# EAGLE board PSv1_18_2_12 (EAGLE 5.10)
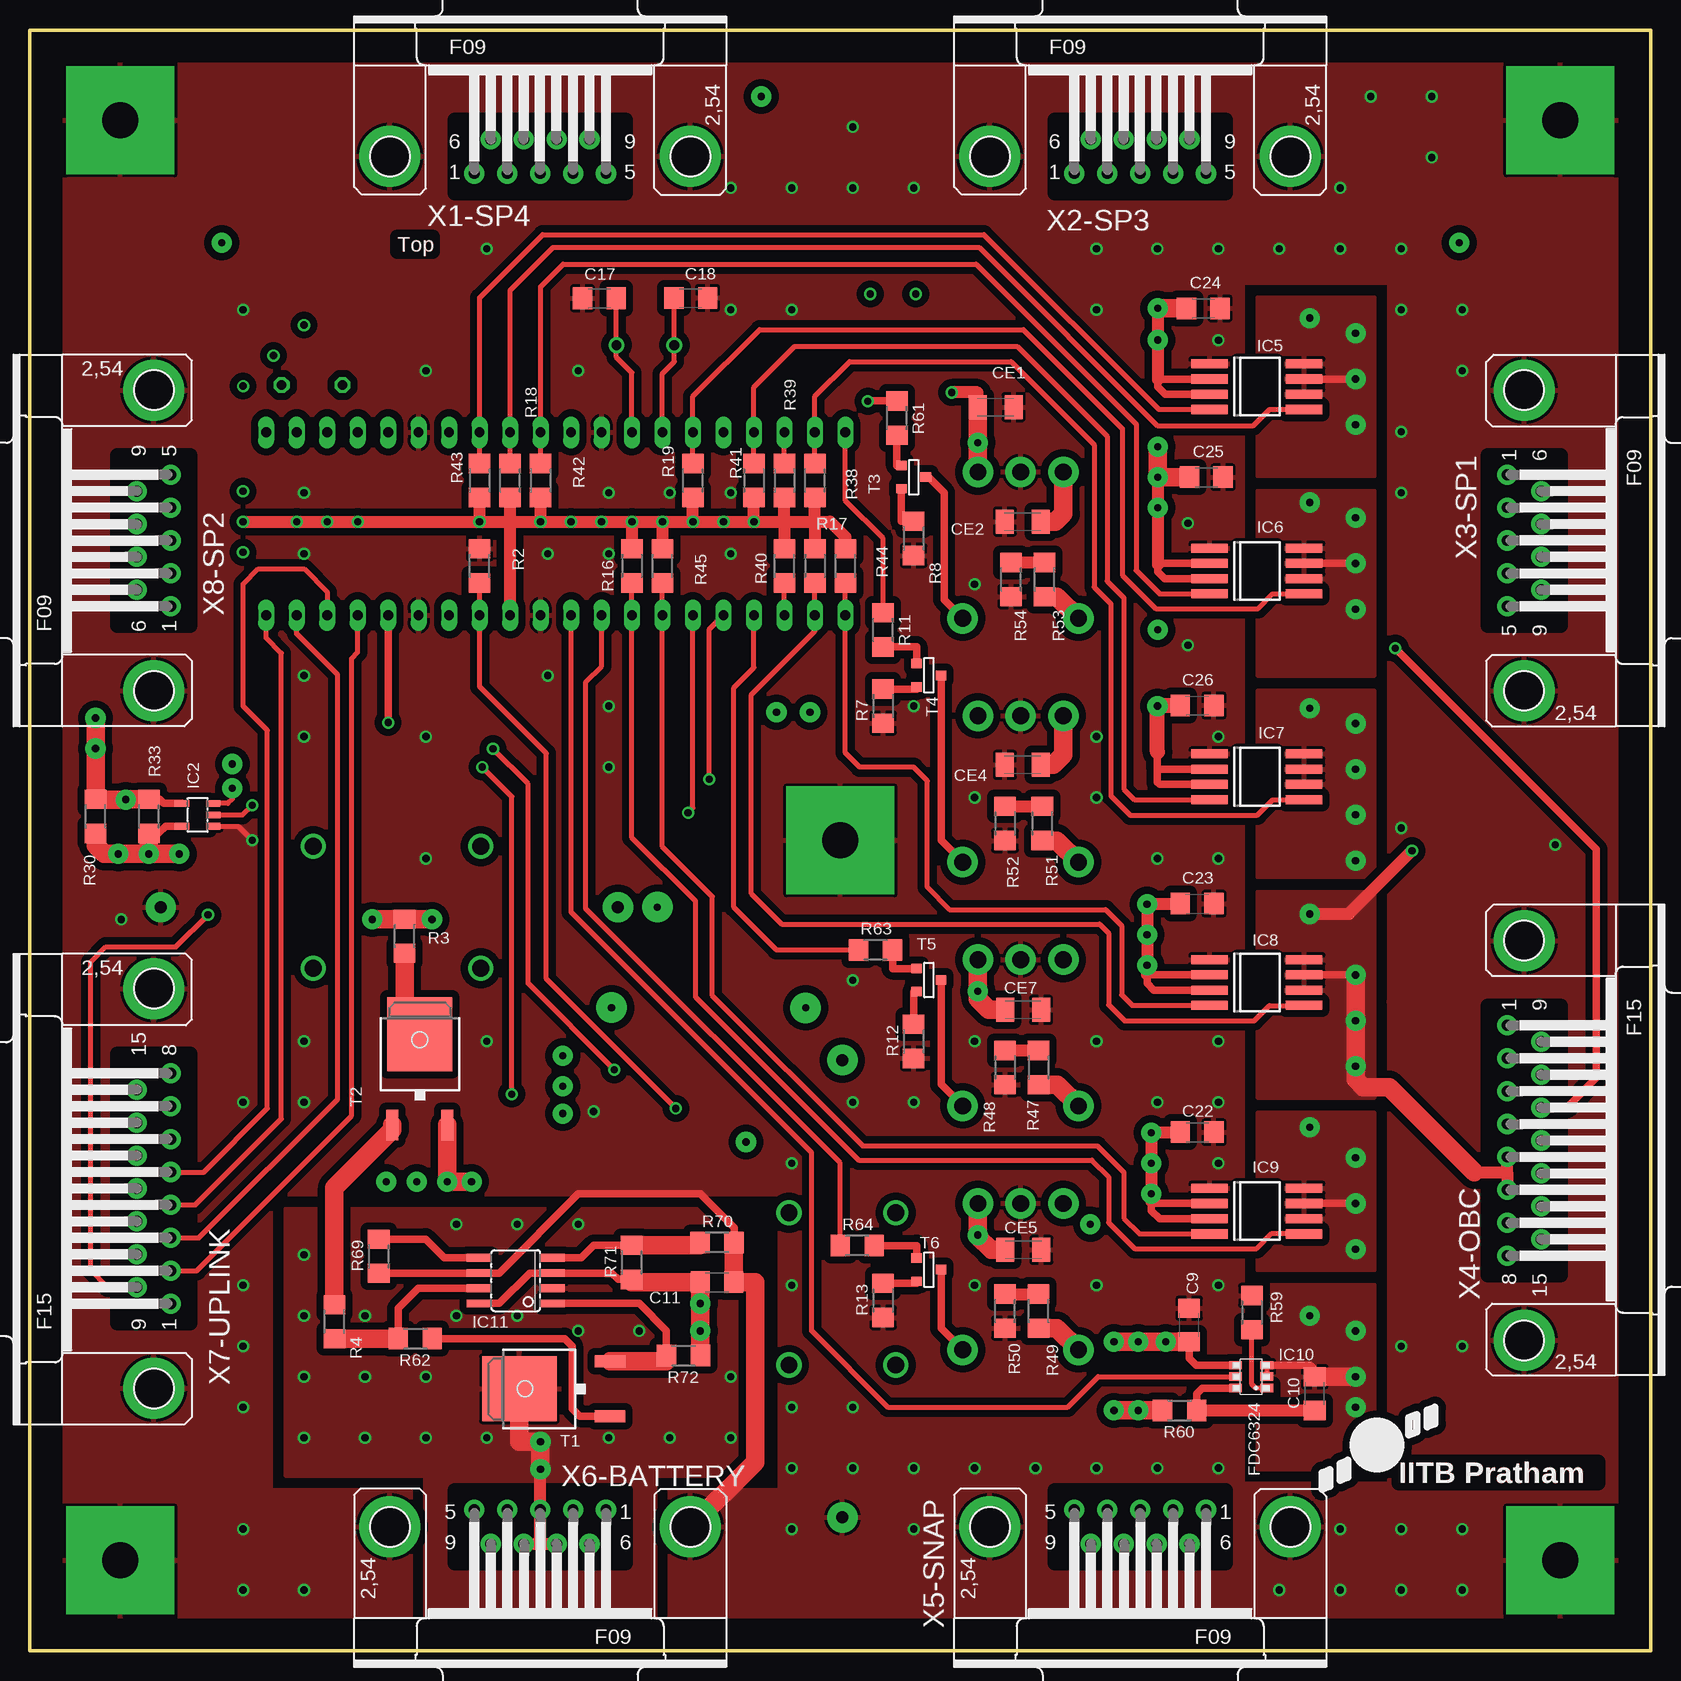
[diagram p0: board, top side]
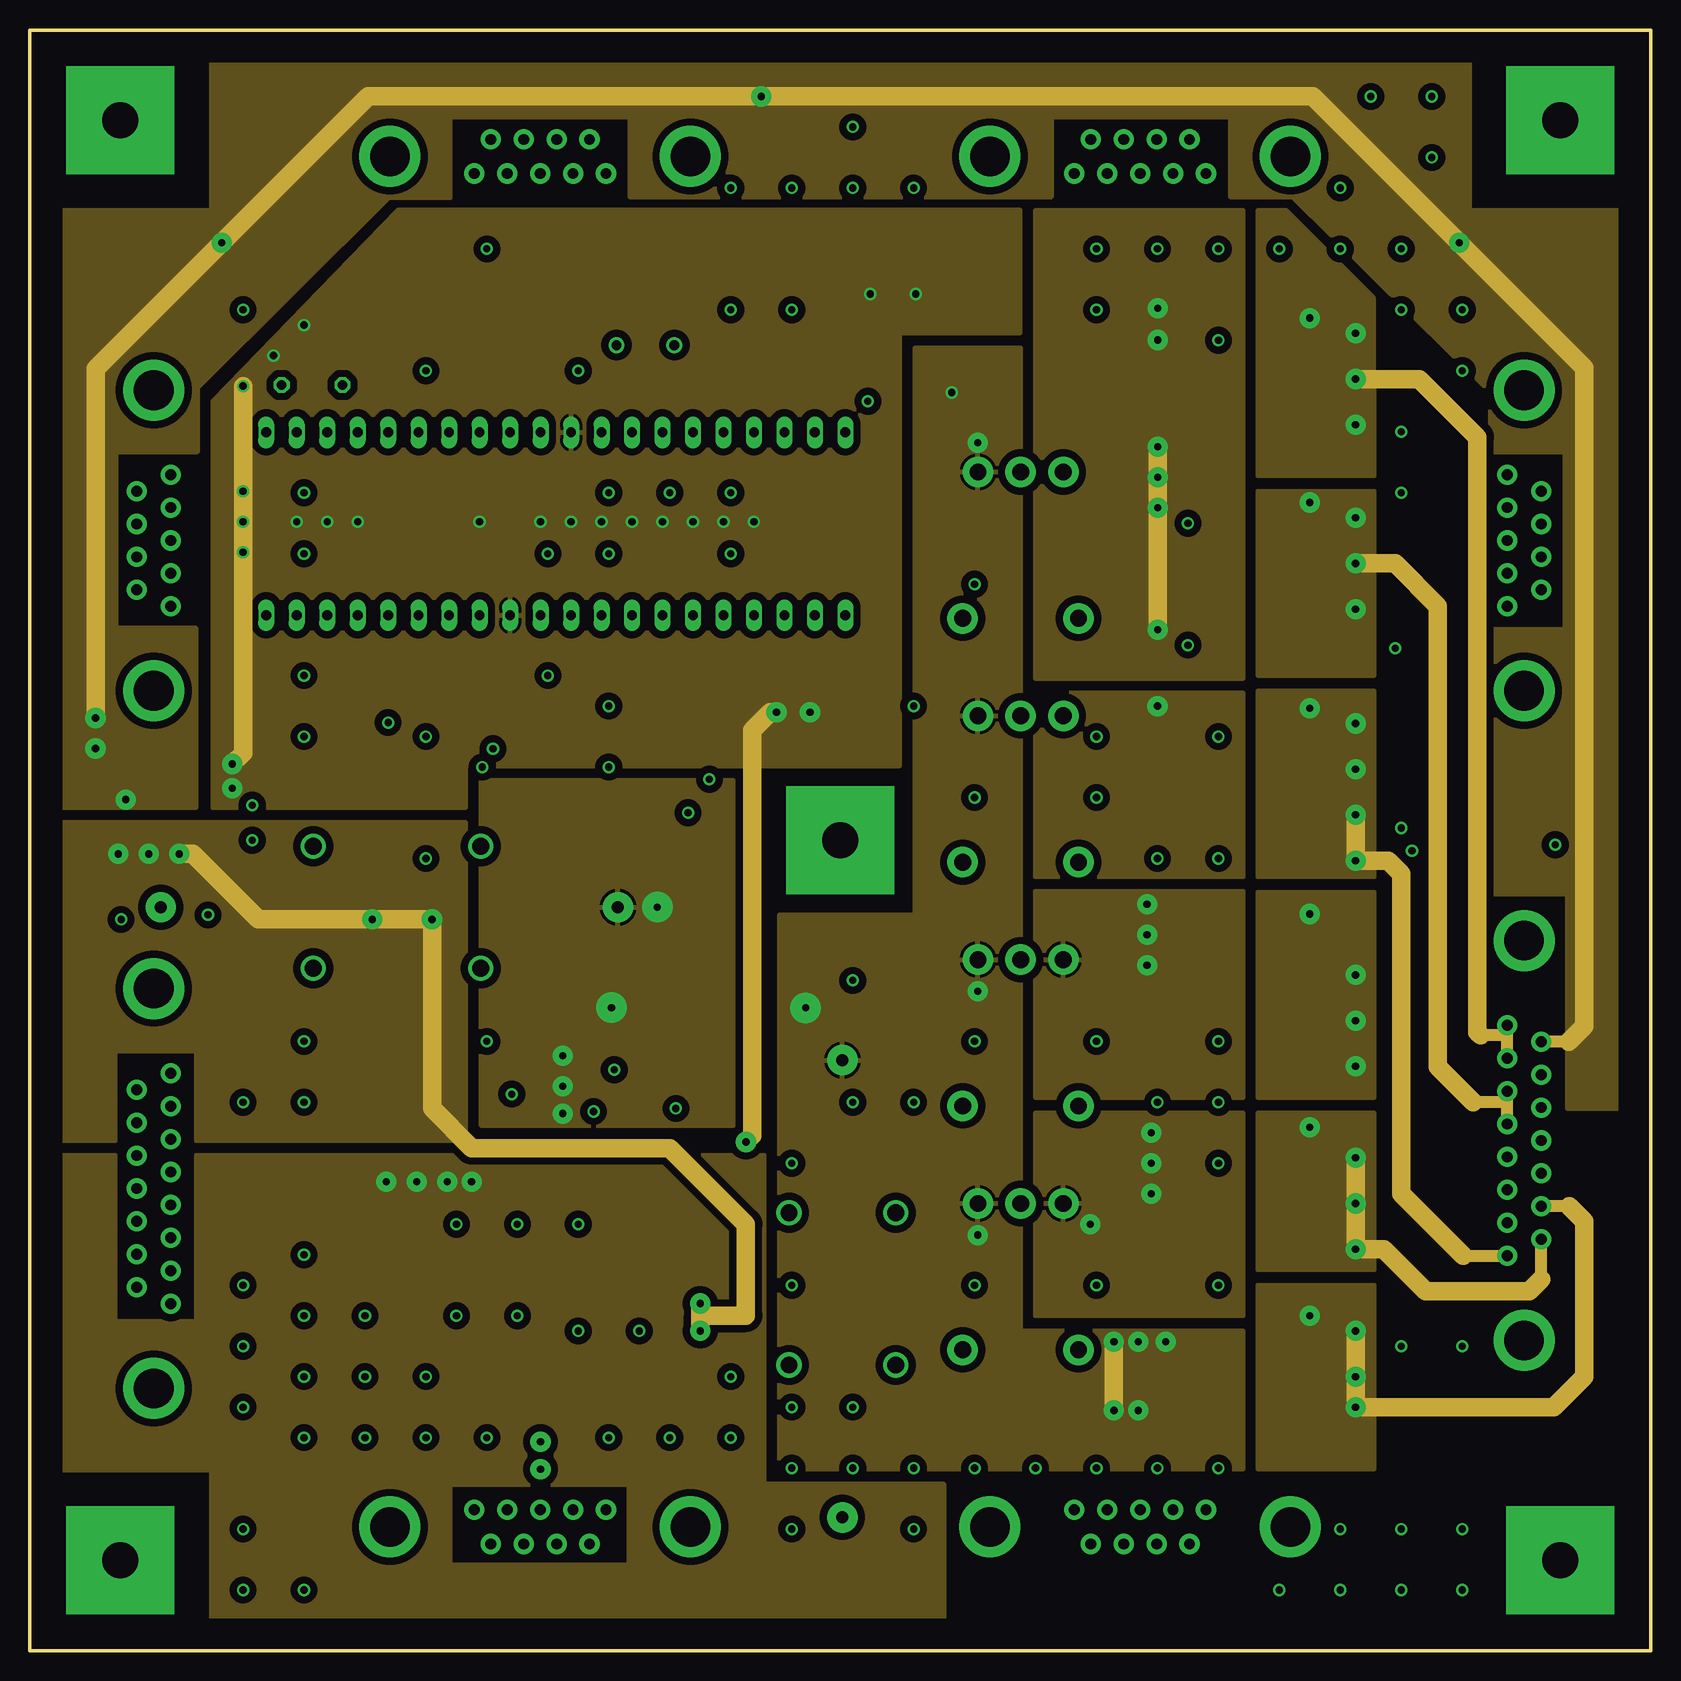
[diagram p1: board, inner layer Power]
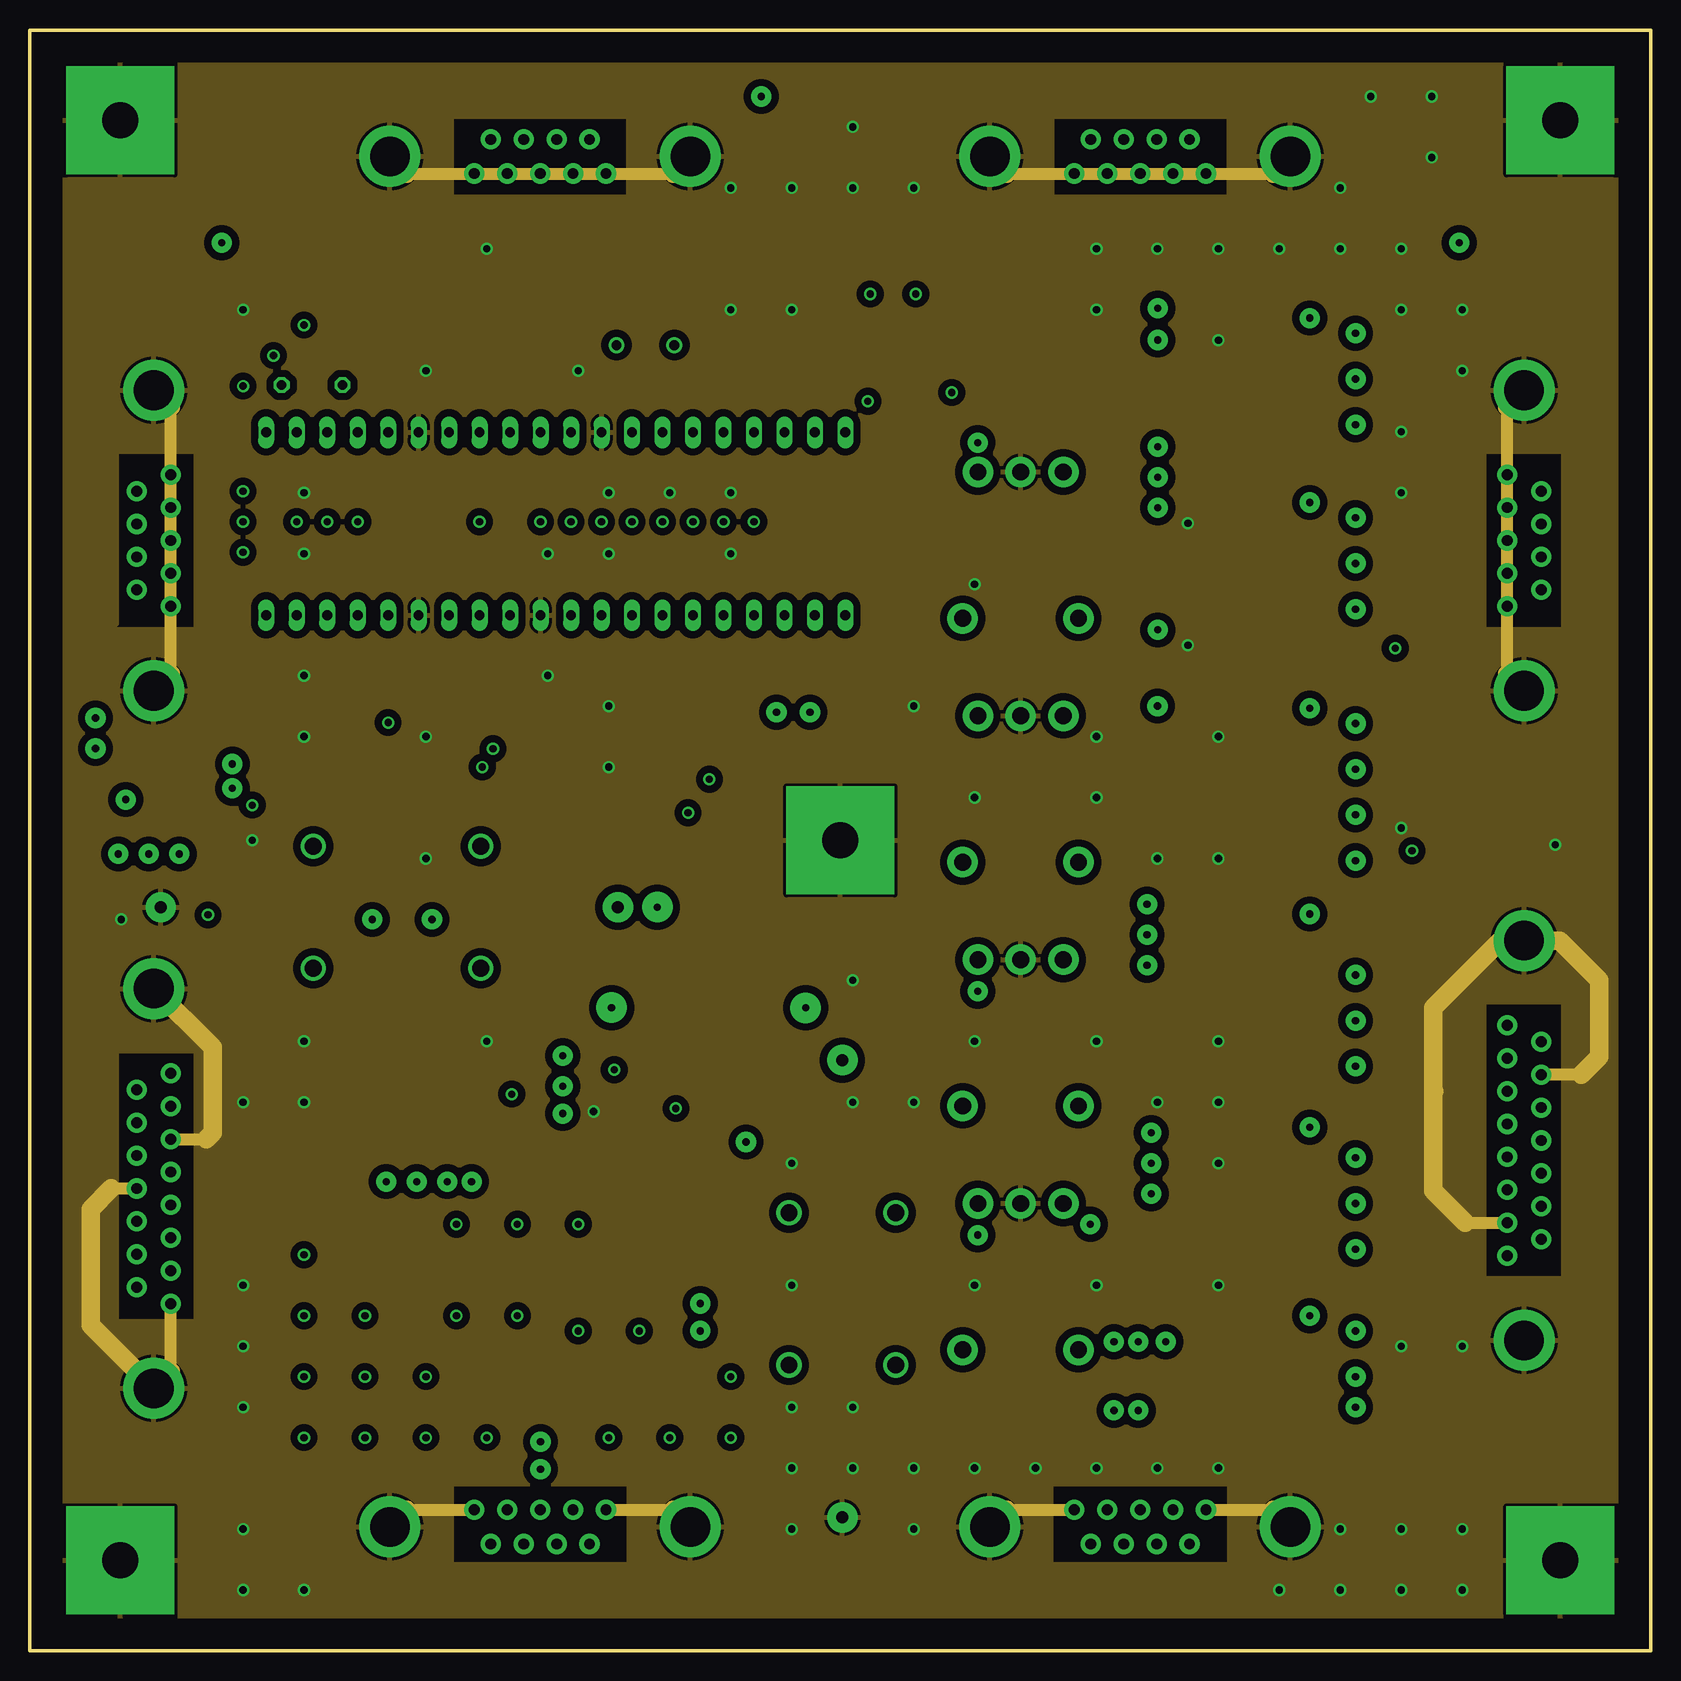
[diagram p2: board, inner layer Gnd]
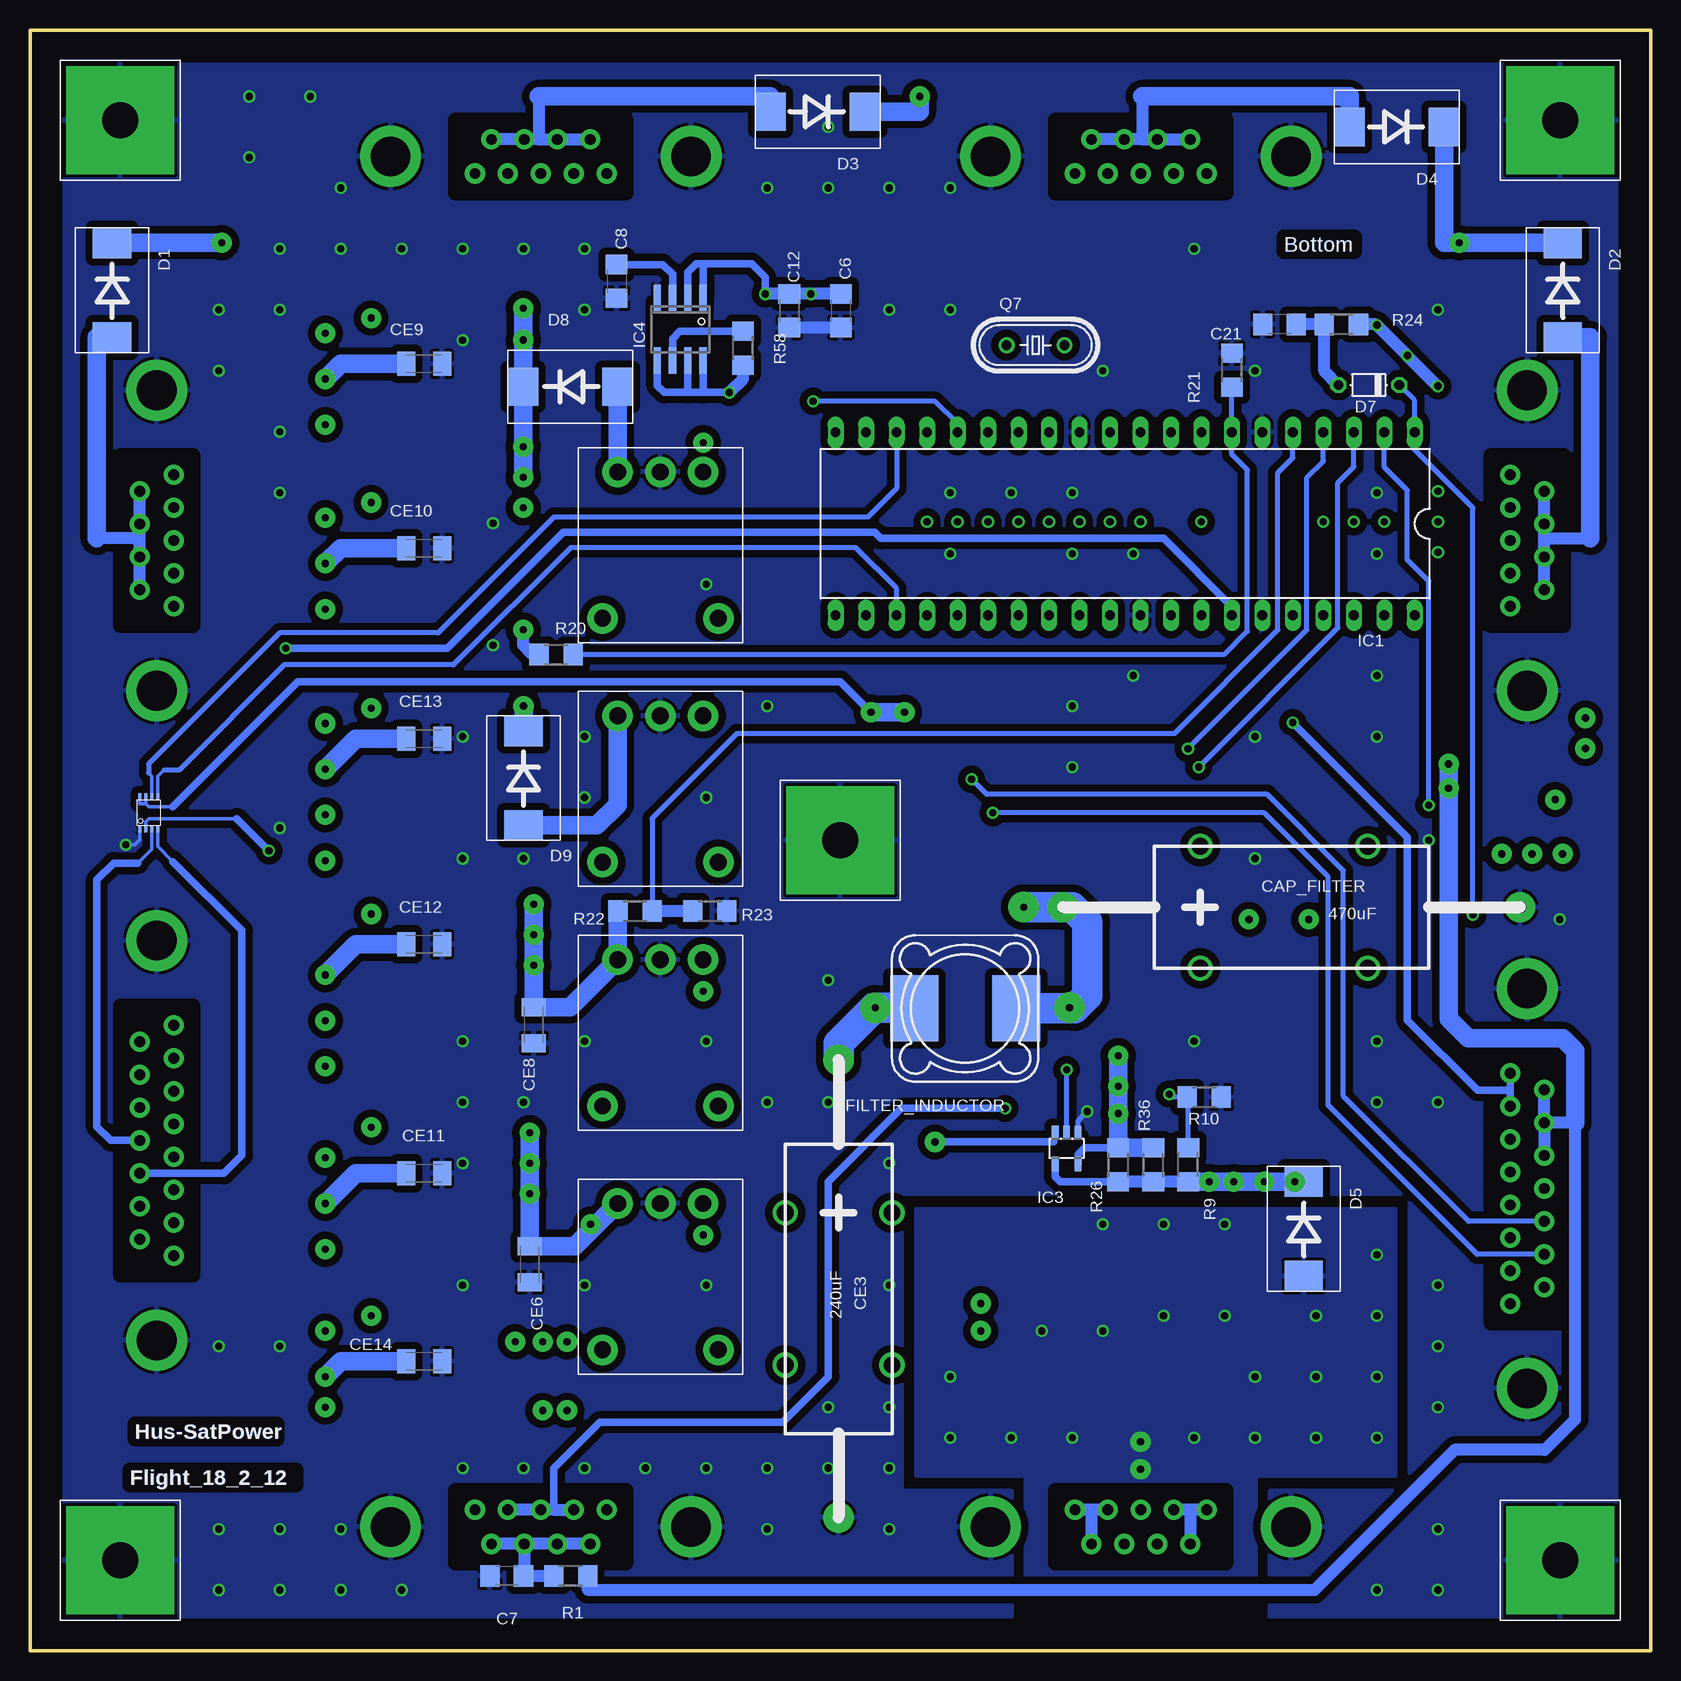
[diagram p3: board, bottom side, seen from below]

Size 135.08 x 135.08 mm. Coordinates in mm from the lower left corner, seen from the top.
Outline: 0,0 135.08,0 135.08,135.08 0,135.08 0,0
Copper layers (1*16): Top 0.07mm / dielectric 1.5mm / Bottom 0.07mm
Design rules "satellite": minimum track width 10mil, minimum drill 20mil, track to track 6mil, track to pad 6mil, pad to pad 6mil, via to via 6mil, smd to smd 6mil, copper to edge 100mil, drill to drill 8mil, minimum pad ring 10mil, minimum via ring 8mil, stop-mask expansion 4mil, vias tented up to drill 0mil, thermal gap 10mil
Net classes: 0 Signal: clearance 0.305 mm; 1 Power: clearance 0.305 mm to class 0, clearance 0.305 mm; 2 Signal1: clearance 0.305 mm to class 0, clearance 0.305 mm to class 1, clearance 0.305 mm

## Footprints (pad centres in the part's own frame; a part is rotated, then mirrored left to right if it is on the bottom)
C1206 = smd 1.6 x 1.8: 1 -1.4,0; 2 1.4,0
CAP-POL-T3 = drill 1 pad 2.54 round: P$1 -19.05,0; P$2 19.05,0 | drill 1.4 pad 1.397 round: P$3 -7.62,5.08; P$4 -7.62,-5.08; P$5 6.35,-5.08; P$6 6.35,5.08
C1206K = smd 1.5 x 2: 1 -1.5,0; 2 1.5,0
CAP-POL-T2 = drill 1 pad 2.54 round: P$1 -19.05,0; P$2 19.05,0 | drill 1.4 pad 1.397 round: P$3 6.35,4.445; P$4 -6.35,4.445; P$5 -6.35,-4.445; P$6 6.35,-4.445
DIODE = smd 2.54 x 3.175: A 7.366,0; C -0.508,0
D-5 = drill 0.813 octagon: A 2.54,0; C -2.54,0
MSS1260 = smd 5.5 x 4: P$1 0,4.25; P$2 0,-4.25
DIL40 = drill 0.813 long: 1 -24.13,-7.62; 2 -21.59,-7.62; 3 -19.05,-7.62; 4 -16.51,-7.62; 5 -13.97,-7.62; 6 -11.43,-7.62; 7 -8.89,-7.62; 8 -6.35,-7.62; 9 -3.81,-7.62; 10 -1.27,-7.62; 11 1.27,-7.62; 12 3.81,-7.62; 13 6.35,-7.62; 14 8.89,-7.62; 15 11.43,-7.62; 16 13.97,-7.62; 17 16.51,-7.62; 18 19.05,-7.62; 19 21.59,-7.62; 20 24.13,-7.62; 21 24.13,7.62; 22 21.59,7.62; 23 19.05,7.62; 24 16.51,7.62; 25 13.97,7.62; 26 11.43,7.62; 27 8.89,7.62; 28 6.35,7.62; 29 3.81,7.62; 30 1.27,7.62; 31 -1.27,7.62; 32 -3.81,7.62; 33 -6.35,7.62; 34 -8.89,7.62; 35 -11.43,7.62; 36 -13.97,7.62; 37 -16.51,7.62; 38 -19.05,7.62; 39 -21.59,7.62; 40 -24.13,7.62
SOT-23-5 = smd 0.55 x 1.2: 1 -0.95,-1.3; 2 0,-1.3; 3 0.95,-1.3; 4 0.95,1.3; 5 -0.95,1.3
SO8 = smd 0.6 x 2.2: 1 -1.905,-2.6; 2 -0.635,-2.6; 3 0.635,-2.6; 4 1.905,-2.6; 5 1.905,2.6; 6 0.635,2.6; 7 -0.635,2.6; 8 -1.905,2.6
SO-8 = smd 0.762 x 3.048: 1 -1.905,-3.937; 2 -0.635,-3.937; 3 0.635,-3.937; 4 1.905,-3.937; 5 1.905,3.937; 6 0.635,3.937; 7 -0.635,3.937; 8 -1.905,3.937
SUPER-SOT-6 = smd 0.7 x 1.06: 1 -0.95,-1.3; 2 0,-1.3; 3 0.95,-1.3; 4 0.95,1.3; 5 0,1.3; 6 -0.95,1.3
SOIC-8 = smd 0.66 x 2.032: 1 -1.905,-3.073; 2 -0.635,-3.073; 3 0.635,-3.073; 4 1.905,-3.073; 5 1.905,3.073; 6 0.635,3.073; 7 -0.635,3.073; 8 -1.905,3.073
DIP-05 = drill 1.4 pad 2.54 round: 1 -6.35,3.556; 2 -6.35,0; 3 -6.35,-3.556; 4 5.842,-4.826; 5 5.842,4.826
HC49/S = drill 0.813 round: 1 -2.413,0; 2 2.413,0
R1206 = smd 1.6 x 1.803: 1 -1.422,0; 2 1.422,0
DPAK-TO252 = smd 1 x 2.54: 1 -2.28,-5.054; 3 2.28,-5.054 | smd 5.4 x 6.2: 2 0,2.5
SOT-23 = smd 0.787 x 0.889: 1 0.025,-1.016; 2 -0.94,1.016; 3 0.991,1.016
PSOP-8 = smd 0.25 x 0.5: 1 -0.73,-1.37; 2 -0.23,-1.37; 3 0.27,-1.37; 4 0.77,-1.37; 5 0.77,1.38; 6 0.27,1.38; 7 -0.23,1.38; 8 -0.73,1.38
MOUNT_10MM = drill 3 pad 9 square: P$1 0,0
F09HP = drill 0.9 pad 1.676 round: 1 -5.486,-1.422; 2 -2.743,-1.422; 3 0,-1.422; 4 2.743,-1.422; 5 5.486,-1.422; 6 -4.115,1.422; 7 -1.372,1.422; 8 1.372,1.422; 9 4.115,1.422 | drill 3.302 pad 5.08 round: G1 -12.522,0; G2 12.522,0
F15HP = drill 0.9 pad 1.676 round: 1 -9.601,-1.422; 2 -6.858,-1.422; 3 -4.115,-1.422; 4 -1.372,-1.422; 5 1.372,-1.422; 6 4.115,-1.422; 7 6.858,-1.422; 8 9.601,-1.422; 9 -8.23,1.422; 10 -5.486,1.422; 11 -2.743,1.422; 12 0,1.422; 13 2.743,1.422; 14 5.486,1.422; 15 8.23,1.422 | drill 3.302 pad 5.08 round: G1 16.662,0; G2 -16.662,0

## Placement (x,y rotation side)
C6  0.1u  [C1206]  67.51,111.68 270 bottom
C7  0.1uF  [C1206]  95.35,6.25 180 bottom
C8  0.1u  [C1206]  86.19,114.13 270 bottom
C9  0.1u  [C1206]  96.6,27.17 90 top
C10  0.1u  [C1206]  107.06,21.45 90 top
C11  0.1uF  [C1206]  57.25,30.73 0 top
C12  0.1u  [C1206]  71.81,111.68 270 bottom
C17  33pF  [C1206]  47.45,112.72 0 top
C18  33pF  [C1206]  55.07,112.75 0 top
C21  0.1u  [C1206]  30.95,110.55 180 bottom
C22  0.1u  [C1206]  97.26,43.23 0 top
C23  0.1u  [C1206]  97.26,62.28 0 top
C24  0.1u  [C1206]  97.77,111.89 0 top
C25  0.1u  [C1206]  98.02,97.82 0 top
C26  0.1u  [C1206]  97.26,78.79 0 top
CAP_FILTER  470uF  [CAP-POL-T3]  29.95,61.98 0 bottom
CE1  47uF  [C1206K]  80.48,103.66 0 top
CE2  10uF  [C1206K]  82.73,94.1 180 top
CE3  240uF  [CAP-POL-T2]  67.69,30.18 270 bottom
CE4  10uF  [C1206K]  82.73,73.84 180 top
CE5  47uF  [C1206K]  82.78,33.43 0 top
CE6  10uF  [C1206K]  93.45,32.21 270 bottom
CE7  47uF  [C1206K]  82.75,53.42 0 top
CE8  10uF  [C1206K]  93.09,52.15 270 bottom
CE9  47uF  [C1206K]  102.23,107.27 0 bottom
CE10  47uF  [C1206K]  102.23,91.9 0 bottom
CE11  47uF  [C1206K]  102.23,39.83 0 bottom
CE12  47uF  [C1206K]  102.23,58.88 0 bottom
CE13  47uF  [C1206K]  102.23,76.03 0 bottom
CE14  47uF  [C1206K]  102.23,24.13 0 bottom
D1  MBRS320  [DIODE]  128.24,116.84 270 bottom
D2  MBRS320  [DIODE]  7.34,116.84 270 bottom
D3  MBRS320  [DIODE]  66.01,128.27 180 bottom
D4  MBRS320  [DIODE]  17.75,127 180 bottom
D5  MBRS320  [DIODE]  28.93,38.61 270 bottom
D7  1N5819  [D-5]  23.51,105.49 180 bottom
D8  MBRS320  [DIODE]  93.47,105.36 0 bottom
D9  MBRS320  [DIODE]  93.95,76.17 270 bottom
FILTER_INDUCTOR  1uH  [MSS1260]  57.15,53.55 90 bottom
IC1  PIC16F877P  [DIL40]  43.82,93.93 180 bottom
IC2  MAX4372  [SOT-23-5]  13.97,69.68 90 top
IC3  MAX4372  [SOT-23-5]  48.69,41.88 180 bottom
IC4  REG103UA-5  [SO8]  80.9,110.14 180 bottom
IC5  TPS2030  [SO-8]  102.23,105.36 270 top
IC6  TPS2030  [SO-8]  102.23,90 270 top
IC7  TPS2030  [SO-8]  102.23,72.85 270 top
IC8  TPS2030  [SO-8]  102.23,55.7 270 top
IC9  TPS2030  [SO-8]  102.23,36.66 270 top
IC10  FDC6324  [SUPER-SOT-6]  101.77,22.86 90 top
IC11  BO2057  [SOIC-8]  40.49,30.86 90 top
M1  PTH08080  [DIP-05]  82.55,91.9 270 bottom
M2  PTH08080  [DIP-05]  82.55,71.58 270 bottom
M3  PTH08080  [DIP-05]  82.55,51.26 270 bottom
M4  PTH08080  [DIP-05]  82.55,30.94 270 bottom
Q7  8MHz  [HC49/S]  51.28,108.82 180 bottom
R1  100K  [R1206]  90.02,6.25 0 bottom
R2  100K  [R1206]  37.47,90.42 270 top
R3  0.2E  [R1206]  31.22,59.56 270 top
R4  1K  [R1206]  25.37,27.43 270 top
R7  0.2E  [R1206]  71.09,78.74 90 top
R8  0.2E  [R1206]  73.63,92.71 90 top
R9  10K  [R1206]  38.56,40.51 270 bottom
R10  10K  [R1206]  37.23,46.15 180 bottom
R11  1K  [R1206]  71.09,85.09 270 top
R12  0.2E  [R1206]  73.63,50.8 90 top
R13  0.2E  [R1206]  71.09,29.21 90 top
R16  10K  [R1206]  50.16,90.42 90 top
R17  10K  [R1206]  65.41,90.42 90 top
R18  10K  [R1206]  40.01,97.54 270 top
R19  10K  [R1206]  55.25,97.54 270 top
R20  10K  [R1206]  91.24,83.03 180 bottom
R21  10K  [R1206]  34.93,106.73 270 bottom
R22  10K  [R1206]  84.66,61.67 180 bottom
R23  10K  [R1206]  78.44,61.67 180 bottom
R24  10K  [R1206]  25.8,110.55 0 bottom
R26  0.01  [R1206]  44.4,40.51 90 bottom
R30  0.01E  [R1206]  5.46,69.55 270 top
R33  0.01E  [R1206]  9.91,69.55 270 top
R36  0.01  [R1206]  41.48,40.51 90 bottom
R38  10K  [R1206]  65.41,97.54 270 top
R39  10K  [R1206]  62.87,97.54 90 top
R40  10K  [R1206]  62.87,90.42 270 top
R41  100K  [R1206]  60.33,97.54 90 top
R42  100K  [R1206]  42.55,97.54 90 top
R43  100K  [R1206]  37.47,97.54 90 top
R44  100K  [R1206]  67.95,90.42 270 top
R45  100K  [R1206]  52.7,90.42 270 top
R47  1K  [R1206]  84.05,48.62 90 top
R48  890E  [R1206]  81.25,48.62 90 top
R49  220E  [R1206]  84.05,28.32 270 top
R50  133E  [R1206]  81.25,28.32 270 top
R51  1K  [R1206]  84.35,68.96 90 top
R52  100E  [R1206]  81.25,68.96 90 top
R53  220E  [R1206]  84.56,89.28 270 top
R54  133E  [R1206]  81.76,89.28 270 top
R58  10K  [R1206]  75.65,108.56 270 bottom
R59  1K  [R1206]  101.83,28.19 90 top
R60  47K  [R1206]  95.8,20.05 180 top
R61  1K  [R1206]  72.24,102.74 270 top
R62  1K  [R1206]  32.11,26.04 180 top
R63  1K  [R1206]  70.46,58.42 0 top
R64  1K  [R1206]  68.94,33.78 0 top
R69  100K  [R1206]  29.06,32.89 90 top
R70  22K  [R1206]  57.25,34.04 0 top
R71  22K  [R1206]  50.14,32.38 90 top
R72  0.2E  [R1206]  54.46,24.61 180 top
T1  MJD2955  [DPAK-TO252]  43.28,21.84 90 top
T2  MJD3055  [DPAK-TO252]  32.49,48.89 0 top
T3  [SOT-23]  73.63,97.79 90 top
T4  [SOT-23]  74.9,81.28 90 top
T5  [SOT-23]  74.9,55.88 90 top
T6  [SOT-23]  74.9,31.75 90 top
U$2  PCA9306  [PSOP-8]  125.2,69.85 0 bottom
U$4  MOUNT_SQ  [MOUNT_10MM]  7.54,127.54 180 bottom
U$16  MOUNT_SQ  [MOUNT_10MM]  7.54,7.54 180 bottom
U$17  MOUNT_SQ  [MOUNT_10MM]  127.54,127.54 180 bottom
U$18  MOUNT_SQ  [MOUNT_10MM]  127.54,7.54 180 bottom
U$19  MOUNT_SQ  [MOUNT_10MM]  67.54,67.54 180 bottom
X1-SP4  SolarPower  [F09HP]  42.51,124.54 0 top
X2-SP3  SolarPower  [F09HP]  92.51,124.54 0 top
X3-SP1  SolarPower  [F09HP]  124.51,92.54 270 top
X4-OBC  OBC  [F15HP]  124.51,42.54 270 top
X5-SNAP  Snap  [F09HP]  92.51,10.34 180 top
X6-BATTERY  Battery  [F09HP]  42.51,10.34 180 top
X7-UPLINK  Uplink  [F15HP]  10.31,38.54 90 top
X8-SP2  SolarPower  [F09HP]  10.31,92.54 90 top

## Library data of the parts
C6-C12 C17 C18 C21-C26 CE1 CE2 CE4-CE14 R1-R4 R7-R13 R16-R24 R26 R30 R33 R36 R38-R45 R47-R54 R58-R64 R69-R72 = rcl
CAP_FILTER CE3 D1-D5 D8 D9 IC2-IC11 M1-M4 T1 T2 U$2 U$4 U$16-U$19 X1-SP4 X2-SP3 X3-SP1 X4-OBC X5-SNAP X6-BATTERY X7-UPLINK X8-SP2 = satellite
D7 = diode
FILTER_INDUCTOR = inductor-coilcraft(2)
IC1 = microchip
Q7 = crystal
T3-T6 = zetex

## Nets
+3.3V [Power]: C23.1 CE8.1 IC8.2 IC8.3 M3.3 R22.2
+3.6V [Power]: C26.1 D9.C IC7.2 IC7.3
+5V [Power]: C6.1 C12.1 IC1.11 IC1.32 IC2.3 IC3.3 IC4.1 IC4.2 R1.2 R16.2 R17.2 R18.2 R19.2 R24.2 R38.2 R39.1 R40.1 R41.1 R42.1 R43.1 R44.1 R45.1 U$2.7 U$2.8 X7-UPLINK.13 X7-UPLINK.14 X7-UPLINK.15
+5V_COMM [Power]: C24.1 C25.1 D8.C IC5.2 IC5.3 IC6.2 IC6.3 R20.2
+5V_PGPS [Power]: C22.1 CE6.1 IC9.2 IC9.3 M4.3
AVR_SCL: U$2.3 X4-OBC.12
AVR_SDA: U$2.4 X4-OBC.13
CHARGE_IN [Power]: C11.1 IC2.5 IC11.3 IC11.8 R3.1 R30.2 R33.2 R71.1 R72.1
EN2: IC1.27 IC9.4 R45.2
EN3: IC1.21 IC8.4 R44.2
EN4: IC1.8 IC5.4 R43.2
EN5: IC1.10 IC6.4 R42.2
EN6: IC1.17 IC7.4 R41.2
EN7: IC1.30 IC10.5
GND [Power]: C6.2 C7.2 C8.2 C9.2 C11.2 C12.2 C17.1 C18.2 C21.2 C22.2 C23.2 C24.2 C25.2 C26.2 CAP_FILTER.P$2 CE1.2 CE2.2 CE3.P$2 CE4.2 CE5.2 CE6.2 CE7.2 CE8.2 CE9.2 CE10.2 CE11.2 CE12.2 CE13.2 CE14.2 IC1.6 IC1.12 IC1.31 IC1.35 IC2.1 IC3.1 IC4.4 IC5.1 IC6.1 IC7.1 IC8.1 IC9.1 IC11.6 M1.2 M2.2 M3.2 M4.2 R2.1 R7.1 R8.1 R10.1 R12.1 R13.1 R21.1 R23.1 R48.1 R50.2 R52.1 R54.2 R59.2 R69.1 R70.2 U$2.1 U$4.P$1 U$16.P$1 U$17.P$1 U$18.P$1 U$19.P$1 X1-SP4.1 X1-SP4.2 X1-SP4.3 X1-SP4.4 X1-SP4.5 X1-SP4.G1 X1-SP4.G2 X2-SP3.1 X2-SP3.2 X2-SP3.3 X2-SP3.4 X2-SP3.5 X2-SP3.G1 X2-SP3.G2 X3-SP1.1 X3-SP1.2 X3-SP1.3 X3-SP1.4 X3-SP1.5 X3-SP1.G1 X3-SP1.G2 X4-OBC.7 X4-OBC.10 X4-OBC.G1 X4-OBC.G2 X5-SNAP.1 X5-SNAP.5 X5-SNAP.G1 X5-SNAP.G2 X6-BATTERY.1 X6-BATTERY.2 X6-BATTERY.4 X6-BATTERY.5 X6-BATTERY.6 X6-BATTERY.9 X6-BATTERY.G1 X6-BATTERY.G2 X7-UPLINK.1 X7-UPLINK.6 X7-UPLINK.12 X7-UPLINK.G1 X7-UPLINK.G2 X8-SP2.1 X8-SP2.2 X8-SP2.3 X8-SP2.4 X8-SP2.5 X8-SP2.G1 X8-SP2.G2
I1: IC1.2 IC2.2
I2: IC1.4 IC3.2
INT: IC1.33 R2.2 X5-SNAP.2 X5-SNAP.3 X5-SNAP.4
N$1: D1.A X3-SP1.6 X3-SP1.7 X3-SP1.8 X3-SP1.9
N$2: D2.A X8-SP2.6 X8-SP2.7 X8-SP2.8 X8-SP2.9
N$3: D3.A X2-SP3.6 X2-SP3.7 X2-SP3.8 X2-SP3.9
N$4: D4.A X1-SP4.6 X1-SP4.7 X1-SP4.8 X1-SP4.9
N$7: IC4.6 R58.1
N$8: R3.2 T2.2
N$9 [Power]: CE2.1 D8.A M1.3
N$10 [Power]: CE4.1 D9.A M2.3
N$11: R4.1 T2.1
N$12: C10.1 IC10.6 R60.1
N$13: C8.1 IC4.3
N$14: C17.2 IC1.13 Q7.1
N$16: M1.5 T3.1
N$18: M3.5 T5.1
N$19: M4.5 T6.1
N$20: R7.2 T4.2
N$22: R61.2 T3.3
N$23: R8.2 T3.2
N$24: R11.2 T4.3
N$25: C7.1 R1.1 X5-SNAP.6 X5-SNAP.7 X5-SNAP.8 X5-SNAP.9
N$26: IC10.1 R59.1
N$28: R63.2 T5.3
N$29: R12.2 T5.2
N$30: R64.2 T6.3
N$31: R13.2 T6.2
N$32: M2.5 T4.1
N$35: C18.1 IC1.14 Q7.2
N$45: M3.4 R47.1
N$46: R47.2 R48.2
N$47: M4.4 R49.2
N$48: R49.1 R50.1
N$49: M2.4 R51.1
N$50: R51.2 R52.2
N$51: M1.4 R53.2
N$52: R53.1 R54.1
N$57: R62.1 T1.1
N$58: IC11.5 R69.2
N$59: IC11.4 R70.1 R71.2
N$60: IC11.1 R72.2 T1.3
N$63: IC11.7 R4.2 R62.2
N$67: C21.1 D7.A R24.1
OC2: IC1.28 IC9.5 R16.1
OC3: IC1.22 IC8.5 R17.1
OC4: IC1.9 IC5.5 R18.1
OC5: IC1.15 IC6.5 R19.1
OC6: IC1.19 IC7.5 R38.1
PBEACON [Power]: CE9.1 IC5.6 IC5.7 IC5.8 X4-OBC.1 X4-OBC.2
PCHARGE [Power]: D1.C D2.C D3.C D4.C IC2.4 R30.1 R33.1 X4-OBC.9
PCONTROL/TORQ [Power]: CE13.1 IC7.6 IC7.7 IC7.8 X4-OBC.8
PDOWNLINK [Power]: CE10.1 IC6.6 IC6.7 IC6.8 X4-OBC.3 X4-OBC.4
PFCHECK: IC1.34 X4-OBC.11
PGC: IC1.39 X7-UPLINK.3
PGD: IC1.40 X7-UPLINK.4
PGM: IC1.36 X7-UPLINK.7 X7-UPLINK.8
PGPS [Power]: CE11.1 IC9.6 IC9.7 IC9.8 X4-OBC.15
PMAG [Power]: C10.2 CE14.1 IC10.2 IC10.3 X4-OBC.14
POBC [Power]: CE12.1 IC8.6 IC8.7 IC8.8 U$2.2 X4-OBC.5 X4-OBC.6
PON1: IC1.16 R61.1
PON2: IC1.20 R11.1
PON3: IC1.24 R63.1
PON4: IC1.29 R64.1
RX: IC1.26 X7-UPLINK.10
SCL: IC1.18 R39.2 U$2.6
SDA: IC1.23 R40.2 U$2.5
TX: IC1.25 X7-UPLINK.11
UPGPIO: IC1.37 X7-UPLINK.2
UPINT: IC1.38 X7-UPLINK.5
V1: IC1.3 R9.1 R10.2
V2: IC1.7 R20.1 R21.2
V3: IC1.5 R22.1 R23.2
VBAT [Power]: D5.A IC11.2 T1.2 X6-BATTERY.3 X6-BATTERY.7 X6-BATTERY.8
VBAT_IN: D5.C IC3.4 R9.2 R26.1 R36.1 T2.3
VI [Power]: C9.1 CE1.1 CE3.P$1 CE5.1 CE7.1 FILTER_INDUCTOR.P$1 IC4.5 IC4.7 IC4.8 IC10.4 M1.1 M2.1 M3.1 M4.1 R58.2 R60.2
VIN [Power]: CAP_FILTER.P$1 FILTER_INDUCTOR.P$2 IC3.5 R26.2 R36.2
VPP: D7.C IC1.1 X7-UPLINK.9

## Tracks (layer width: path | path; a pad name or v marks a point on that pad's centre or on a via)
+3.3V  (via drill 0.6 pad 1.68)
  Top 0.61: 93.09,56.34 IC8.2 | 93.09,56.39 93.09,56.34 | IC8.3 93.65,55.07 93.09,55.63 93.09,56.34
  Top 1.016: C23.1 93.14,62.28 v93.09,62.23 93.09,56.39
  Bottom 1.524: v93.09,62.23 CE8.1 90.07,53.65 M3.3 86.11,61.67 R22.2
  other vias: 93.09,57.15 93.09,59.69
  pour Power (isolate 0.61): 83.79,63.32 101.07,63.32 101.07,46.1 83.79,46.1
+3.6V  (via drill 0.6 pad 1.68)
  Top 0.61: 93.95,73.48 93.95,74.93 | 93.95,73.48 IC7.2 | IC7.3 94.13,72.22 93.95,72.39 93.95,73.48
  Top 1.27: C26.1 93.95,78.79 v93.95,78.74 93.95,74.93
  Bottom 1.524: v93.95,78.74 D9.C
  pour Power (isolate 0.61): 83.79,79.83 101.07,79.83 101.07,64.52 83.79,64.52
+5V  (via drill 0.6 pad 0.41, 0.6 pad 1.02, 0.6 pad 1.68)
  Top 0.406: IC2.3 16.5,70.62 16.87,70.99 v16.87,71.88
  Top 1.016: v60.32,94.11 v57.78,94.11 v55.24,94.11 55.09,94.11 | v60.32,94.11 62.71,94.11 | 62.71,94.11 62.86,94.11 | 65.4,94.11 R17.2 | 62.86,94.11 R40.1 | 39.98,94.11 39.98,86.23 | v42.54,94.11 v50.16,94.11 | v50.16,94.11 v52.7,94.11 | v52.7,94.11 55.09,94.11 | v37.46,94.11 39.98,94.11 | R39.1 62.86,94.26 62.71,94.11 | R19.2 55.24,94.26 55.09,94.11 | 65.4,94.11 66.67,94.11 67.94,92.84 R44.1 | 62.86,94.11 65.4,94.11 | 65.4,94.11 R38.2 | v42.54,94.11 R42.1 | 40,94.11 v42.54,94.11 | v37.46,94.11 R43.1 | v17.75,94.11 v37.46,94.11 | 40,94.11 R18.2 | 39.98,94.11 40,94.11 | v50.16,94.11 R16.2 | v52.7,94.11 R45.1 | R41.1 arc90 60.32,95.48 v60.32,94.11
  Power 1.524: v17.75,105.41 v17.75,94.11 17.75,74.8 v16.87,73.91 | v62.2,78.23 61.7,78.23 60.17,76.71 60.17,42.93 v59.66,42.42
  Bottom 0.305: 125.43,70.59 U$2.7 | U$2.8 125.93,70.59 125.43,70.59 | 125.43,70.59 125.2,70.36 123.16,70.36
  Bottom 0.406: IC3.3 49.64,42.53 49.76,42.42
  Bottom 0.61: IC4.2 80.26,114.91 79.56,115.62 78.99,115.62 | v73.82,113.08 73.82,114.48 74.95,115.62 78.99,115.62 | 78.99,115.62 IC4.1 | v65,78.23 67.54,80.77 112.75,80.77 123.16,70.36 | 49.76,42.42 v59.66,42.42
  Bottom 1.016: C6.1 C12.1 v73.82,113.08 | v17.75,105.41 22.9,110.55 R24.2 | X7-UPLINK.14 X7-UPLINK.13 | X7-UPLINK.14 X7-UPLINK.15 | X7-UPLINK.14 6.32,44.03 6.32,19.3 8.86,16.76 16.36,16.76 28.04,5.08 88.6,5.08 R1.2
  Bottom 1.524: v62.2,78.23 v65,78.23 | v16.87,73.91 v16.87,71.88 16.87,52.7 15.21,51.05 7.34,51.05 6.32,50.04 6.32,44.03
  other vias: 47.62,94.11 45.09,94.11 27.31,94.11 24.77,94.11 22.23,94.11 17.75,96.65 17.75,91.57 20.29,107.95 22.83,110.49 70.01,113.08
  pour Power (isolate 0.61): 30.63,120.05 15.21,104.14 15.21,70.29 36.3,70.29 36.3,73.79 72.49,73.79 72.49,109.86 82.52,109.86 82.52,120.05
+5V_COMM  (via drill 0.6 pad 1.68)
  Top 0.61: IC5.3 94.61,104.73 D8.C 93.98,105.97 98.27,105.97 IC5.2 | IC6.3 94.56,89.36 93.98,89.94 93.98,90.53 94.08,90.63 IC6.2
  Top 1.016: v93.98,111.89 93.98,105.97 | v93.98,97.82 93.98,90.53
  Top 1.524: C25.1 v93.98,97.82 v93.98,100.36 | v93.98,111.89 C24.1
  Power 1.524: v93.98,85.09 v93.98,100.36
  Bottom 1.016: R20.2 93.17,83.03 93.98,83.85 v93.98,85.09
  Bottom 1.524: v93.98,97.82 D8.C v93.98,111.89
  other vias: 93.98,109.25 93.98,95.28
  pour Power (isolate 0.61): 83.79,120.05 101.07,120.05 101.07,81.03 83.79,81.03
+5V_PGPS  (via drill 0.6 pad 1.68)
  Top 0.61: 93.45,37.46 93.45,37.34 | IC9.2 93.49,37.29 93.45,37.34 | IC9.3 94.13,36.02 93.45,36.7 93.45,37.34
  Top 1.016: C22.1 93.5,43.23 v93.45,43.18 93.45,37.46
  Bottom 1.524: v93.45,43.18 CE6.1 89.69,33.71 M4.3
  other vias: 93.45,38.1 88.37,35.56 93.45,40.64
  pour Power (isolate 0.61): 83.79,44.83 101.07,44.83 101.07,27.91 83.79,27.91
AVR_SCL
  Bottom 0.305: U$2.3 124.93,66.82 126.08,65.66
  Bottom 0.61: X4-OBC.12 128.37,42.54 129.51,43.69 129.51,64.26 128.11,65.66 126.08,65.66
AVR_SDA
  Bottom 0.305: 123.16,65.79 124.43,67.05 U$2.4
  Bottom 0.61: X4-OBC.13 118.93,39.8 117.42,41.3 117.42,60.05 123.16,65.79
CHARGE_IN  (via drill 0.6 pad 1.68)
  Top 0.61: IC2.5 11.3,68.73 10.7,68.13 R33.2 | IC11.8 39.09,28.96 41.63,31.5 IC11.3 48.49,31.5 49.02,30.96 R71.1
  Top 1.524: v9.91,66.42 R33.2 | v9.91,66.42 v7.37,66.42 6.2,66.42 5.46,67.16 R30.2 | v9.91,66.42 v12.45,66.42 | v33.5,60.96 31.72,60.96 | v28.52,60.96 31.22,60.96 R3.1 | R72.1 55.86,24.61 v55.86,26.67 v55.85,26.67 v55.85,28.96 C11.1 50.14,30.73 R71.1
  Power 1.524: v12.45,66.42 13.56,66.42 19.02,60.96 v28.52,60.96 32.99,60.96 | 55.85,27.94 59.66,27.94 59.66,35.56 53.31,41.91 36.8,41.91 33.5,45.21 v33.5,60.96 | v55.85,28.96 55.85,27.94 | v55.85,26.67 55.85,27.94
  pour Power (isolate 0.61): 2.51,42.55 7.12,42.55 7.12,50.04 13.85,50.04 13.85,42.55 36.3,42.55 36.3,69.02 2.51,69.02
EN2
  Top 0.406: 98.68,34.75 IC9.4 92.48,34.75 91.16,36.07 91.16,39.88 88.94,42.1 69.38,42.1 56.87,54.61 56.87,62.87 52.7,67.03 IC1.27 R45.2
EN3
  Top 0.406: IC8.4 91.84,53.8 90.97,54.67 90.97,60.45 89.64,61.78 76.62,61.78 74.78,63.63 74.78,72.52 73.63,73.66 69.13,73.66 67.94,74.84 IC1.21 R44.2
EN4
  Top 0.406: IC5.4 94.07,103.46 79.49,118.03 42.72,118.03 37.46,112.78 IC1.8 R43.2
EN5
  Top 0.406: IC6.4 94.13,88.09 92.18,90.04 92.18,102.23 78.84,115.57 44.42,115.57 42.54,113.69 IC1.10 R42.2
EN6
  Top 0.406: IC7.4 92.03,70.95 91.16,71.82 91.16,87.76 89.76,89.15 89.76,101.22 82.27,108.71 63.73,108.71 60.32,105.31 IC1.17 R41.2
EN7
  Top 0.406: IC10.5 89,22.86 86.46,20.32 71.48,20.32 65.13,26.67 65.13,41.53 45.08,61.57 IC1.30
GND  (via drill 0.6)
  Top 0.406: IC2.1 17.36,68.73 v18.52,67.56
  Top 0.61: IC7.1 98.33,74.76 98.37,74.8 | R70.2 58.67,35.28 55.85,38.1 45.69,38.1 39.09,31.5 IC11.6 29.06,31.5 R69.1
  Top 1.524: X6-BATTERY.G1 60.43,15.73 60.43,30.73 C11.2 58.65,34.04 R70.2
  Gnd 1.016: 119.61,35.68 X4-OBC.7 | 129.28,48.03 X4-OBC.10 | 6.76,38.54 X7-UPLINK.12 | X7-UPLINK.6 14.69,42.66 | 81.41,123.12 X2-SP3.1 X2-SP3.2 X2-SP3.3 X2-SP3.4 X2-SP3.5 103.61,123.12 | 123.09,81.44 X3-SP1.5 X3-SP1.4 X3-SP1.3 X3-SP1.2 X3-SP1.1 123.09,103.64 | 11.74,103.64 X8-SP2.5 X8-SP2.4 X8-SP2.3 X8-SP2.2 X8-SP2.1 11.74,81.44 | X6-BATTERY.1 53.61,11.76 | 31.41,11.76 X6-BATTERY.5 | X5-SNAP.1 103.61,11.76 | 81.41,11.76 X5-SNAP.5 | 11.74,23.3 X7-UPLINK.1 | 31.41,123.12 X1-SP4.1 X1-SP4.2 X1-SP4.3 X1-SP4.4 X1-SP4.5 53.61,123.12
  Gnd 1.524: 116.94,46.74 116.94,38.35 119.61,35.68 | 116.94,46.74 116.94,53.6 122.54,59.2 X4-OBC.G2 127.46,59.2 130.78,55.88 130.78,49.53 129.28,48.03 | 116.94,46.74 117.02,46.66 | 6.76,38.54 5.05,36.83 5.05,27.14 X7-UPLINK.G2 11.74,23.3 | 14.69,42.66 15.21,43.18 15.21,50.3 X7-UPLINK.G1 | X2-SP3.G1 81.41,123.12 | 103.61,123.12 X2-SP3.G2 | X3-SP1.G2 123.09,81.44 | 123.09,103.64 X3-SP1.G1 | 11.74,103.64 X8-SP2.G2 | X8-SP2.G1 11.74,81.44 | 53.61,11.76 X6-BATTERY.G1 | X6-BATTERY.G2 31.41,11.76 | 103.61,11.76 X5-SNAP.G1 | X5-SNAP.G2 81.41,11.76 | X1-SP4.G1 31.41,123.12 | 53.61,123.12 X1-SP4.G2
  Bottom 0.305: U$2.1 125.93,67.6 126.34,67.18 v127.1,67.18
  Bottom 0.406: IC3.1 47.74,44.18 v46.96,44.96
  Bottom 1.016: C6.2 C12.2 | 38.4,11.76 X6-BATTERY.9 | X6-BATTERY.5 38.4,11.76 | 38.4,11.76 X6-BATTERY.4 | 46.63,11.76 X6-BATTERY.6 | X6-BATTERY.2 46.63,11.76 | 46.63,11.76 X6-BATTERY.1
  other vias: 17.75,5.08 17.75,10.16 22.83,5.08 17.75,20.32 17.75,25.4 17.75,30.48 17.75,45.72 22.83,45.72 22.83,50.8 32.99,66.04 32.99,76.2 22.83,76.2 22.83,81.28 43.15,81.28 43.15,91.44 48.23,91.44 58.39,91.44 58.39,96.52 53.31,96.52 48.23,96.52 22.83,96.52 22.83,91.44 32.99,106.68 38.07,116.84 58.39,111.76 63.47,111.76 88.87,111.76 88.87,116.84 93.95,116.84 99.03,116.84 104.11,116.84 109.19,116.84 114.27,116.84 109.19,121.92 116.81,124.46 116.81,129.54 111.73,129.54 119.35,111.76 114.27,111.76 119.35,106.68 114.27,101.6 114.27,96.52 114.27,68.58 73.63,121.92 68.55,121.92 68.55,127 17.75,111.76 45.69,106.68 38.07,50.8 93.95,15.24 99.03,15.24 114.27,10.16 119.35,10.16 119.35,5.08 114.27,5.08 109.19,5.08 104.11,5.08 109.19,10.16 88.87,15.24 83.79,15.24 78.71,15.24 73.63,15.24 68.55,15.24 63.47,15.24 73.63,10.16 63.47,10.16 63.47,20.32 68.55,20.32 63.47,30.48 73.63,78.74 48.23,78.74 48.23,73.66 7.59,60.96 63.47,40.64 73.63,45.72 68.55,45.72 68.55,55.88 78.71,50.8 88.87,50.8 99.03,50.8 99.03,45.72 93.95,45.72 99.03,40.64 99.03,30.48 88.87,30.48 78.71,30.48 114.27,25.4 119.35,25.4 88.87,71.12 88.87,76.2 78.71,71.12 78.71,88.9 99.03,76.2 99.03,66.04 93.95,66.04 96.49,83.82 96.49,93.98 99.03,109.22 63.47,121.92 58.39,121.92
  pour Bottom (isolate 0.61): 2.51,132.54 2.51,2.54 31.72,2.54 31.72,13.34 20.07,13.34 20.07,38.1 62.46,38.1 62.46,13.34 53.31,13.34 53.31,2.54 132.51,2.54 132.51,132.54
  pour Top (isolate 0.61): 2.51,2.54 31.72,2.54 31.72,13.34 20.07,13.34 20.07,38.1 62.46,38.1 62.46,13.34 53.31,13.34 53.31,2.54 132.51,2.54 132.51,54.03 113.26,54.03 113.26,13.88 101.07,13.88 101.07,114.05 113.26,114.05 113.26,54.17 132.51,54.17 132.51,132.54 2.51,132.54
  pour Gnd (isolate 0.61): 2.51,132.54 35.09,132.54 35.09,121.19 49.89,121.19 49.89,127.86 35.15,127.86 35.15,132.54 85.13,132.54 85.13,121.19 99.92,121.19 99.92,127.86 85.26,127.86 85.26,132.54 132.51,132.54 132.51,99.95 121.16,99.95 121.16,85.15 127.83,85.15 127.83,99.82 132.51,99.82 132.51,54.04 121.16,54.04 121.16,31.05 127.83,31.05 127.83,53.91 132.51,53.91 132.51,2.54 99.99,2.54 99.99,13.88 85.06,13.88 85.06,7.21 99.86,7.21 99.86,2.54 49.95,2.54 49.95,13.88 35.09,13.88 35.09,7.21 49.76,7.21 49.76,2.54 2.51,2.54 2.51,27.5 13.85,27.5 13.85,49.97 7.18,49.97 7.18,27.62 2.51,27.62 2.51,85.15 13.85,85.15 13.85,99.95 7.18,99.95 7.18,85.53 2.51,85.28
I1  (via drill 0.6 pad 0.41)
  Top 0.406: v18.52,70.48 17.71,69.68 IC2.2
  Bottom 0.406: IC1.2 22.22,98.65 20.29,96.72 20.29,90.93 18.52,89.15 v18.52,70.48
I2  (via drill 0.6)
  Top 0.406: v48.69,48.44 41.5,55.63 41.5,72.26 v38.58,75.18
  Bottom 0.406: IC1.4 27.3,99.16 28.68,97.79 28.68,85.09 v38.58,75.18 | IC3.2 v48.69,48.44
INT  (via drill 0.6)
  Top 0.406: R2.2 IC1.33 37.46,80.37 43.03,74.8 43.03,56.01 v53.82,45.21
  Bottom 0.61: v53.82,45.21 62.46,45.21 68.55,39.12 68.55,22.86 72.36,19.05 87.6,19.05 91.41,15.24 91.41,11.76
  Bottom 1.016: X5-SNAP.2 X5-SNAP.3 91.41,11.76 X5-SNAP.4
N$1
  Bottom 1.016: X3-SP1.9 X3-SP1.8 125.94,92.71 | X3-SP1.6 X3-SP1.7 125.94,92.71 | 125.94,92.71 129.51,92.71
  Bottom 1.524: D1.A 129.51,109.47 129.51,92.71
N$2
  Bottom 1.016: X8-SP2.6 X8-SP2.7 8.89,92.71 | X8-SP2.9 X8-SP2.8 8.89,92.71 | 8.89,92.71 5.05,92.71
  Bottom 1.524: D2.A 5.05,109.47 5.05,92.71
N$3
  Bottom 1.016: X2-SP3.9 X2-SP3.8 92.68,125.96 | X2-SP3.6 X2-SP3.7 92.68,125.96 | 92.68,129.54 92.68,125.96
  Bottom 1.524: D3.A 73.38,129.54 92.68,129.54
N$4
  Bottom 1.016: X1-SP4.9 X1-SP4.8 42.39,125.96 | X1-SP4.6 X1-SP4.7 42.39,125.96 | 42.39,129.54 42.39,125.96
  Bottom 1.524: D4.A 25.12,129.54 42.39,129.54
N$5
  Top 0.61: 114.91,19.43 115.54,19.68 115.54,18.29 114.91,18.03 114.91,19.43
N$6
  Top 0.61: 116.43,20.04 117.07,20.29 117.07,18.92 116.43,18.67 116.43,20.04
N$7
  Bottom 0.61: IC4.6 81.53,109.37 80.92,109.98 R58.1
N$8
  Top 1.016: T2.2 31.22,51.39
  Top 1.524: 31.22,51.39 R3.2
N$9
  Top 1.524: CE2.1 85.44,94.1 86.11,94.77 M1.3
  Bottom 1.524: M1.3 D8.A
N$10
  Top 1.524: CE4.1 85.27,73.84 86.11,74.68 M2.3
  Bottom 1.524: D9.A 87.83,68.81 86.11,70.54 M2.3
N$11
  Top 1.524: R4.1 25.37,38.61 30.21,43.44 T2.1
N$12
  Top 0.61: IC10.6 97.7,21.91 97.22,21.43 R60.1
  Top 1.016: R60.1 C10.1
N$13
  Bottom 0.406: IC4.3
  Bottom 0.61: IC4.3 81.53,114.71 82.36,115.53 C8.1
N$14
  Top 0.406: IC1.13 50.16,106.53 48.87,107.82 Q7.1 48.85,108.84 C17.2
N$15
  Top 0.61: 109.19,15.62 109.83,15.88 109.83,14.48 109.19,14.22 109.19,15.62
N$16
  Top 0.61: T3.1 74.88,97.82 76.17,96.52 76.17,87.61 M1.5
N$17
  Top 0.61: 107.67,14.86 108.31,15.11 108.31,13.72 107.67,13.46 107.67,14.86
N$18
  Top 0.61: T5.1 75.92,47.22 M3.5
N$19
  Top 0.61: T6.1 75.92,26.9 M4.5
N$20
  Top 0.61: T4.2 73.89,80.16 R7.2
N$22
  Top 0.61: R61.2 72.24,98.78 T3.3
N$23
  Top 0.61: T3.2 72.62,94.13 R8.2
N$24
  Top 0.61: T4.3 73.89,83.67 R11.2
N$25
  Bottom 1.016: X5-SNAP.9 X5-SNAP.8 X5-SNAP.7 | X5-SNAP.7 X5-SNAP.6 | R1.1 C7.1 93.89,6.25 X5-SNAP.7
N$26
  Top 0.406: IC10.1 102.14,21.91 101.83,22.22 R59.1
N$28
  Top 0.61: R63.2 71.88,56.87 T5.3
N$29
  Top 0.61: R12.2 73.63,54.94 T5.2
N$30
  Top 0.61: T6.3 73.89,33.78 R64.2
N$31
  Top 0.61: T6.2 73.89,30.63 R13.2
N$32
  Top 0.61: T4.1 75.92,67.54 M2.5
N$35
  Top 0.406: IC1.14 52.7,106.45 53.7,107.44 Q7.2 53.67,108.85 C18.1
N$45
  Top 1.524: R47.1 85.6,47.2 M3.4
N$46
  Top 1.016: R48.2 R47.2
N$47
  Top 1.524: R49.2 85.57,26.9 M4.4
N$48
  Top 1.016: R50.1 R49.1
N$49
  Top 1.524: R51.1 85.58,67.54 M2.4
N$50
  Top 1.016: R52.2 R51.2
N$51
  Top 1.524: R53.2 85.57,87.86 M1.4
N$52
  Top 1.016: R54.1 R53.1
N$57
  Top 0.61: R62.1 44.55,26.04 45.19,25.4 45.19,20.19 45.82,19.56 T1.1
N$58
  Top 0.61: IC11.5 34.52,32.77 32.97,34.31 R69.2
N$59
  Top 0.61: IC11.4 45.95,32.77 46.99,33.81 R71.2
  Top 1.524: R71.2 55.83,33.81 R70.1
N$60
  Top 0.61: IC11.1 50.77,28.96 53.04,26.7 R72.2
  Top 1.524: T1.3 53.04,24.12 R72.2
N$63
  Top 0.61: IC11.7 32.36,30.23 30.68,28.55 R62.2
  Top 1.524: R4.2 25.4,26.04 R62.2
N$67
  Bottom 1.016: C21.1 R24.1 27.22,106.67 D7.A
OC2
  Top 0.406: 106.12,34.8 103.48,34.8 102.21,33.53 92.05,33.53 89.89,35.69 89.89,39.5 88.49,40.89 69.06,40.89 55.47,54.49 55.47,62.48 50.16,67.78 IC1.28 R16.1
  Top 0.61: 106.12,34.8 IC9.5
OC3
  Top 0.406: 106.16,53.78 103.29,53.78 102.02,52.51 91.22,52.51 89.89,53.85 89.89,59.82 89.13,60.58 62.65,60.58 60.11,63.12 60.11,79.69 65.4,84.99 IC1.22 R17.1
  Top 0.61: 106.16,53.78 IC8.5
OC4
  Top 0.406: IC5.5 103.3,103.46 101.96,102.11 93.95,102.11 79.1,116.97 43.6,116.97 40,113.37 IC1.9 R18.1
OC5
  Top 0.406: IC6.5 103.56,88.09 102.34,86.87 93.83,86.87 91.03,89.66 91.03,101.85 82.78,110.11 60.81,110.11 55.24,104.55 IC1.15 R19.1
OC6
  Top 0.406: 106.16,70.93 103.54,70.93 102.27,69.66 91.67,69.66 90.08,71.25 90.08,87.25 88.68,88.65 88.68,100.52 81.76,107.44 68.3,107.44 65.4,104.55 IC1.19 R38.1
  Top 0.61: 106.16,70.93 IC7.5
PBEACON  (via drill 0.6 pad 1.68)
  Top 0.61: v110.46,105.99 IC5.7
  Power 1.016: 123.09,51.31 120.88,51.31 | 123.09,51.31 X4-OBC.1 | X4-OBC.2 123.09,51.31
  Power 1.524: v110.46,105.99 115.77,105.99 120.62,101.14 120.62,51.56 120.88,51.31
  Bottom 1.524: CE9.1 109.19,107.27 v110.46,105.99
  other vias: 110.46,109.8 106.65,111.07 110.46,102.18
  pour Power (isolate 0.61): 102.34,120.05 104.65,120.05 111.93,112.78 111.99,97.92 102.34,97.92
  pour Top (isolate 0.61): 102.34,112.78 111.99,112.78 111.99,97.92 102.34,97.92
PCHARGE  (via drill 0.6 pad 1.68)
  Top 0.61: IC2.4 11.14,70.62 10.79,70.97 R33.1
  Top 1.524: v5.46,77.75 v5.46,75.21 R30.1 5.46,70.95 v7.99,70.95 7.99,70.97 R33.1
  Power 1.016: 128.21,50.77 X4-OBC.9
  Power 1.524: v5.46,77.75 5.46,106.83 v15.98,117.35 28.17,129.54 v60.93,129.54 106.91,129.54 v119.1,117.35 129.51,106.93 129.51,52.07 128.21,50.77
  Bottom 1.524: D2.C v15.98,117.35 17.25,117.35 D4.C | v119.1,117.35 D1.C | D3.C 60.93,128.27 v60.93,129.54
  pour Power (isolate 0.61): 132.51,45.21 132.51,120.01 119.99,120.02 119.99,132.54 15.09,132.54 15.09,120.02 2.51,120.02 2.51,70.29 13.85,70.29 13.85,85.22 7.2,85.22 7.2,99.95 13.98,99.95 13.98,105.32 29.91,121.13 35.03,121.13 35.03,127.86 49.96,127.86 49.96,121.19 85.14,121.19 85.14,127.86 100,127.86 100,121.19 105.24,121.19 121.69,104.93 121.69,99.95 127.91,99.95 127.91,85.09 121.69,85.09 121.69,63.12 128.12,63.12 128.12,45.21
PCONTROL/TORQ  (via drill 0.6 pad 1.68)
  Power 1.016: 119.44,32.94 X4-OBC.8
  Power 1.524: 119.44,32.94 114.27,38.1 114.27,64.77 113.18,65.86 v110.46,65.86 v110.46,69.67
  Bottom 1.524: CE13.1 107.92,76.03 v110.46,73.48
  other vias: 110.46,77.29 106.65,78.56
  pour Power (isolate 0.61): 102.34,80.01 111.99,80.01 111.99,64.52 102.34,64.52
  pour Top (isolate 0.61): 102.34,80.01 111.99,80.01 111.99,64.52 102.34,64.52
PDOWNLINK  (via drill 0.6 pad 1.68)
  Top 0.61: v110.46,90.63 IC6.7
  Power 1.016: 123.09,45.72 120.27,45.72 | 123.09,45.72 X4-OBC.3 | X4-OBC.4 123.09,45.72
  Power 1.524: v110.46,90.63 113.77,90.63 117.32,87.07 117.32,48.67 120.27,45.72
  Bottom 1.524: CE10.1 109.19,91.9 v110.46,90.63
  other vias: 110.46,94.44 110.46,86.82 106.65,95.71
  pour Power (isolate 0.61): 102.34,96.65 111.99,96.65 111.99,81.28 102.34,81.28
  pour Top (isolate 0.61): 102.34,96.65 111.99,96.65 111.99,81.28 102.34,81.28
PFCHECK  (via drill 0.6)
  Top 0.61: X4-OBC.11 128.06,45.28 130.53,47.75 130.53,66.8 v113.77,83.57
  Bottom 0.61: v113.77,83.57 100.3,83.57 90.65,93.22 64.69,93.22 64.18,92.71 40.61,92.71 34.92,87.02 IC1.34
PGC
  Top 0.406: X7-UPLINK.3 14.08,34.43 25.63,45.97 25.63,81.36 22.22,84.76 IC1.39
PGD
  Top 0.406: X7-UPLINK.4 13.77,37.17 20.95,44.35 20.95,83.16 19.68,84.43 IC1.40
PGM  (via drill 0.6)
  Top 0.61: v29.84,77.37 IC1.36
  Bottom 0.61: v29.84,77.37 20.29,67.82 20.29,52.58 14.45,46.74 11.74,46.74 | 11.74,46.74 X7-UPLINK.8 | X7-UPLINK.7 11.74,46.74
PGPS  (via drill 0.6 pad 1.68)
  Top 0.61: IC9.7 v110.46,37.29
  Power 1.016: 125.94,30.97 X4-OBC.15
  Power 1.524: v110.46,41.1 v110.46,37.29 v110.46,33.48 112.8,33.48 116.31,29.97 124.94,29.97 125.94,30.97
  Bottom 1.524: CE11.1 107.92,39.83 v110.46,37.29
  other vias: 106.65,43.64
  pour Power (isolate 0.61): 102.34,44.83 111.99,44.83 111.99,31.75 102.34,31.75
  pour Top (isolate 0.61): 102.34,44.83 111.99,44.83 111.99,31.75 102.34,31.75
PMAG  (via drill 0.6 pad 1.68)
  Top 0.406: IC10.3 IC10.2
  Top 0.61: IC10.3 106.67,23.81 107.06,23.42 C10.2
  Top 1.016: 110.45,22.85 v110.46,22.86
  Top 1.524: C10.2 110.45,22.85
  Power 1.016: 128.27,37.05 X4-OBC.14
  Power 1.524: v110.46,26.67 v110.46,22.86 v110.46,20.32 126.97,20.32 129.51,22.86 129.51,35.81 128.27,37.05
  Bottom 1.524: CE14.1 109.19,24.13 v110.46,22.86
  other vias: 106.65,27.94
  pour Power (isolate 0.61): 102.34,30.48 111.99,30.48 111.99,15.14 102.34,15.14
  pour Top (isolate 0.61): 102.34,30.48 111.99,30.48 111.99,15.14 102.34,15.14
POBC  (via drill 0.6, 0.6 pad 1.68)
  Top 0.61: IC8.7 v110.46,56.34
  Top 1.016: 120.37,39.88 123.09,39.88 | 123.09,39.88 X4-OBC.6 | 123.09,39.88 X4-OBC.5 | v106.65,61.42 109.91,61.42 v115.17,66.68
  Top 1.524: v110.46,56.34 110.46,47.62 111.1,46.99 113.26,46.99 120.37,39.88
  Bottom 0.305: U$2.2 125.43,69.11 125.2,69.34 117.83,69.34
  Bottom 0.61: v115.17,66.68 117.83,69.34
  Bottom 1.524: CE12.1 107.92,58.88 v110.46,56.34
  other vias: 110.46,52.53 110.46,48.72
  pour Power (isolate 0.61): 102.34,63.25 111.99,63.25 111.99,46.1 102.34,46.1
  pour Top (isolate 0.61): 102.34,63.25 111.99,63.25 111.99,46.1 102.34,46.1
PON1  (via drill 0.6)
  Top 0.61: v69.82,104.14 69.82,104.17 R61.1
  Bottom 0.406: IC1.16 57.78,102.26 59.66,104.14 v69.82,104.14
PON2
  Top 0.406: IC1.20 67.94,95.86 71.09,92.71 R11.1
PON3
  Top 0.406: IC1.24 60.32,81.94 58.65,80.26 58.65,61.98 62.2,58.42 R63.1
PON4
  Top 0.406: IC1.29 47.62,82.07 46.33,80.77 46.33,61.85 67.51,40.66 R64.1
RX  (via drill 0.6)
  Top 0.406: IC1.26 55.24,70.26 v54.84,69.85
  Bottom 0.406: v54.84,69.85 32.23,69.85 26.9,64.52 26.9,45.47 14.49,33.05 X7-UPLINK.10
SCL
  Top 0.406: R39.2 IC1.18
  Bottom 0.305: U$2.6 124.93,72.88 125.2,73.15
  Bottom 0.406: IC1.18 62.86,96.88 65.25,94.49 91.41,94.49 101.07,84.84 114.27,84.84 125.2,73.91 125.2,73.15
SDA
  Top 0.406: IC1.23 R40.2
  Bottom 0.305: U$2.5 124.43,72.91 123.93,73.41
  Bottom 0.406: IC1.23 62.86,88.54 66.27,91.95 90.02,91.95 99.8,82.17 113.89,82.17 122.66,73.41 123.93,73.41
TX  (via drill 0.6)
  Top 0.406: IC1.25 56.62,85.14 v56.62,72.64
  Bottom 0.406: X7-UPLINK.11 15.2,35.8 25.63,46.23 25.63,65.02 31.98,71.37 55.35,71.37 v56.62,72.64
UPGPIO
  Top 0.406: X7-UPLINK.2 13.88,31.68 26.8,44.6 26.8,82.7 27.3,83.21 IC1.37
UPINT
  Top 0.406: IC1.38 24.76,88.24 22.83,90.17 19.02,90.17 17.75,88.9 17.75,78.74 19.79,76.71 19.79,45.21 14.49,39.91 X7-UPLINK.5
V1  (via drill 0.6)
  Top 0.406: v37.69,73.66 40.15,71.2 v40.15,46.4
  Bottom 0.406: IC1.3 24.76,98.69 26.09,97.37 26.09,85.26 v37.69,73.66 | R9.1 38.56,46.15 R10.2 39.9,46.15 v40.15,46.4
V2
  Bottom 0.406: R21.2 IC1.7 34.92,99.72 33.63,98.43 33.63,84.96 35.56,83.03 R20.1
V3
  Bottom 0.406: IC1.5 29.84,99.42 31.09,98.17 31.09,85.09 39.73,76.45 76.17,76.45 83.24,69.39 R22.1
  Bottom 1.016: R22.1 R23.2
VBAT  (via drill 0.6, 0.6 pad 1.68)
  Top 1.016: v42.54,15.14 42.54,11.76 42.54,8.92 | 42.54,8.92 X6-BATTERY.7 | X6-BATTERY.8 42.54,8.92
  Top 1.524: 42.54,11.76 X6-BATTERY.3 | v42.54,15.14 v42.54,17.43 40.78,17.43 T1.2
  other vias: 50.77,26.67 45.69,26.67 40.61,27.94 35.53,27.94 22.83,27.94 27.91,27.94 22.83,22.86 22.83,17.78 22.83,33.02 27.91,17.78 32.99,17.78 32.99,22.86 27.91,22.86 38.07,17.78 48.23,17.78 53.31,17.78 58.39,22.86 58.39,17.78 35.53,35.56 40.61,35.56 45.69,35.56
  pour Bottom (isolate 0.61): 21.34,14.61 32.99,14.61 32.99,2.54 52.04,2.54 52.04,14.61 61.19,14.61 61.19,36.83 21.34,36.83
  pour Top (isolate 0.61): 21.34,36.83 61.19,36.83 61.19,14.61 52.04,14.61 52.04,2.54 32.99,2.54 32.99,14.61 21.34,14.61
VBAT_IN  (via drill 0.6 pad 1.68)
  Top 1.524: v36.8,39.11 v34.77,39.11 T2.3
  Bottom 0.61: IC3.4 49.64,39.51 49.23,39.09 R26.1
  Bottom 1.016: R26.1 R36.1 R9.2
  Bottom 1.524: D5.C v32.23,39.12 v32.23,39.11 v34.77,39.11 38.56,39.11 R9.2
  other vias: 29.69,39.11
  pour Power (isolate 0.61): 2.51,41.27 2.51,15.11 15.09,15.11 15.09,2.54 49.76,2.54 49.76,7.14 35.03,7.14 35.03,13.88 49.89,13.88 49.89,2.54 76.17,2.54 76.17,13.88 61.19,13.88 61.19,41.27 13.85,41.27 13.85,27.43 7.12,27.43 7.12,41.27
VI  (via drill 0.6 pad 1.02, 0.6 pad 1.68, 0.6 pad 2.54)
  Top 0.61: IC10.4 97.19,23.81 96.6,24.41 C9.1
  Top 1.016: CE1.1 78.98,104.88 v76.81,104.88
  Top 1.524: M4.1 78.99,34.52 80.08,33.43 CE5.1 | M3.1 78.99,54.33 79.91,53.42 CE7.1 | R60.2 v92.36,20.05 v90.33,20.05 | C9.1 v94.64,25.77 v92.36,25.77 v90.33,25.77 | 78.98,98.27 v78.98,100.7 CE1.1
  Power 1.524: v90.33,20.05 v90.33,25.77
  Bottom 0.406: IC4.8 78.97,107.52 | 80.24,104.88 80.26,104.88 | 79.1,104.88 78.99,104.88
  Bottom 0.61: v76.81,104.88 79.1,104.88 80.24,104.88 82.25,104.88 82.8,105.43 IC4.5 | 80.26,104.88 IC4.7 | 78.99,104.88 IC4.8
  Bottom 1.016: v76.81,104.88 75.65,106.03 R58.2
  Bottom 2.54: CE3.P$1 67.69,50.65 64.74,53.59 v64.64,53.59 61.4,53.59 FILTER_INDUCTOR.P$1
  other vias: 78.98,34.66 78.98,54.98
  pour Power (isolate 0.61): 101.07,15.14 62.46,15.14 62.46,61.34 73.76,61.34 73.76,108.59 82.52,108.59 82.52,26.67 101.07,26.67
VIN  (via drill 0.6 pad 1.68, 0.6 pad 2.54)
  Bottom 0.61: IC3.5 47.74,41.38 47.19,41.94 R26.2
  Bottom 1.524: R36.2 R26.2 v44.4,49.61
  Bottom 2.54: FILTER_INDUCTOR.P$2 48.03,53.55 46.96,54.61 46.96,60.71 48.24,61.98 v52.27,61.98
  other vias: 44.4,44.78 44.4,47.07 48.46,53.6
  pour Power (isolate 0.61): 58.65,43.81 58.65,72.52 37.57,72.52 37.57,43.81
VPP  (via drill 0.6)
  Top 0.406: v14.83,61.34 12.17,58.67 6.32,58.67 5.05,57.4 5.05,31.75 6.49,30.31 X7-UPLINK.9
  Bottom 0.406: v14.83,61.34 14.83,95.25 19.68,100.1 IC1.1 19.7,101.57 19.7,104.22 D7.C
(copper drawn outside any net)
  shapes: Top circle x1

## Text on the board
Top: Top | IITB Pratham
Bottom: Bottom | Hus-SatPower | Flight_18_2_12
tPlace: Top | IITB Pratham
bPlace: Bottom | Hus-SatPower | Flight_18_2_12
bValues: PCA9306